# EAGLE board GoggleController (EAGLE 5.10)
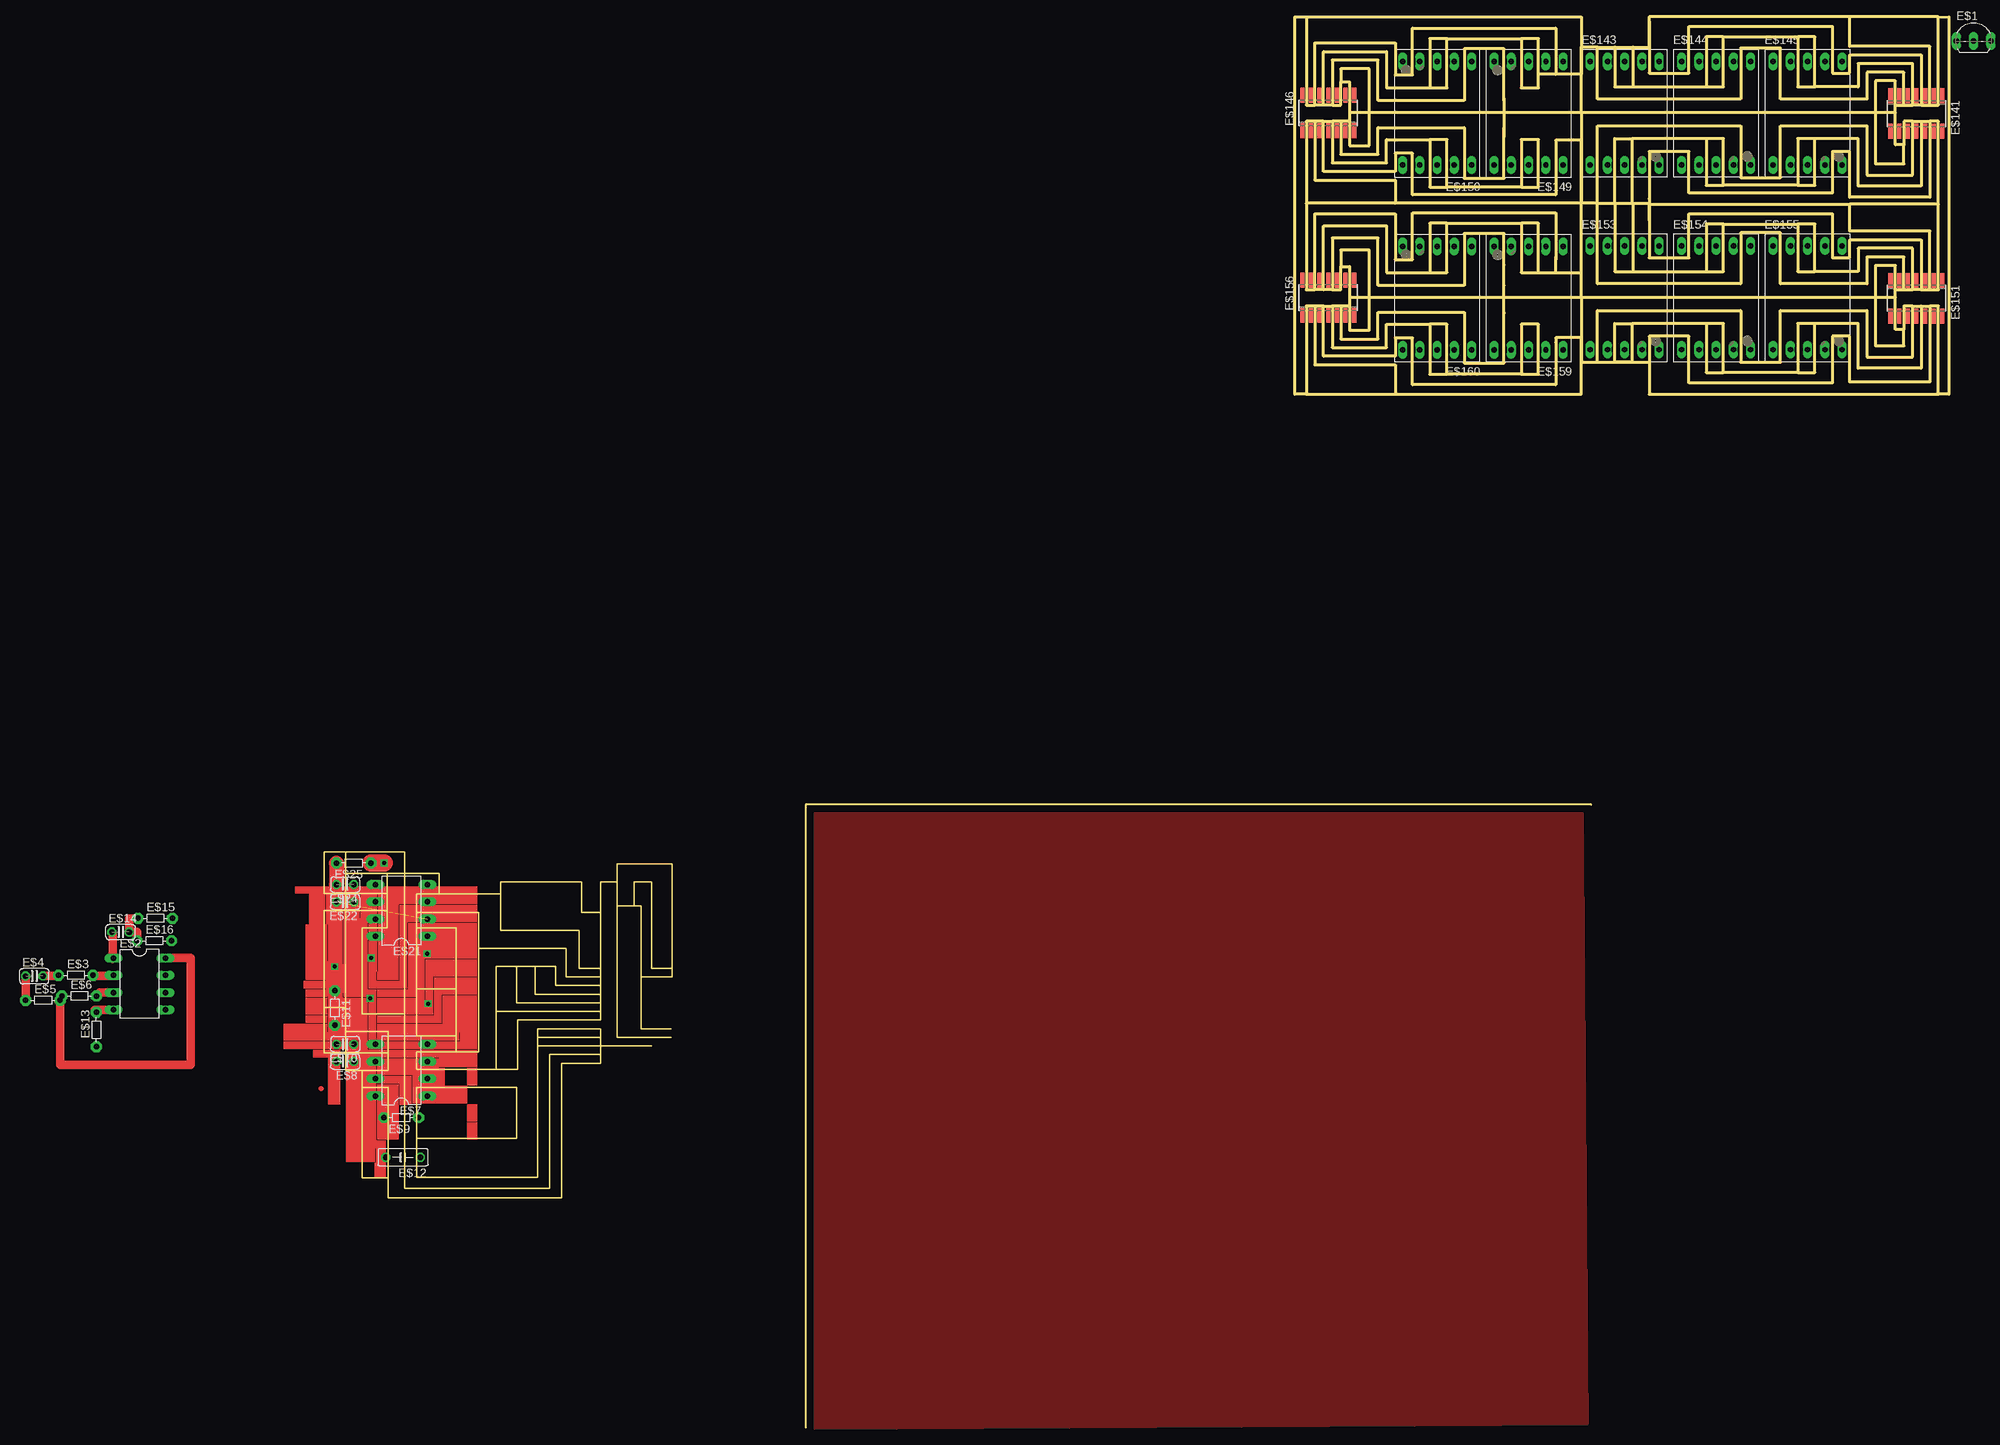
[diagram p0: board, top side]

Size 239.01 x 207.57 mm. Coordinates in mm from the lower left corner, seen from the top.
Outline: 231.14,193.47 228.22,193.47
Outline: 228.22,193.47 184.91,193.47
Outline: 184.91,193.47 184.91,180.14
Outline: 187.32,180.14 187.32,191.57 208.41,191.57 208.41,183.95 214.25,183.95 214.25,191.57 226.95,191.57 226.95,184.33 233.68,184.33 233.68,192.2
Outline: 233.68,192.2 232.41,192.2 232.41,188.77
Outline: 232.41,188.77 231.14,188.77 231.14,194.61
Outline: 231.14,194.61 231.14,198.17 228.22,198.17 228.22,193.47
Outline: 228.22,193.47 228.22,185.98 232.41,185.98 232.41,188.77
Outline: 233.68,192.2 234.95,192.2
Outline: 234.95,192.2 234.95,182.68 225.68,182.68 225.68,189.66 219.33,189.66
Outline: 219.33,189.66 216.79,189.66 216.79,182.8
Outline: 216.79,182.8 205.87,182.8
Outline: 205.87,182.8 205.87,189.66 203.33,189.66
Outline: 203.33,189.66 192.41,189.66
Outline: 192.41,189.66 192.41,180.14
Outline: 234.95,192.2 236.22,192.2
Outline: 236.22,192.2 236.22,181.03 224.41,181.03 224.41,187.76 221.87,187.76 221.87,181.66 200.79,181.66 200.79,187.76 194.94,187.76 194.94,180.77
Outline: 237.49,180.01 237.49,192.2 236.22,192.2
Outline: 189.86,180.14 189.86,189.66 192.41,189.66
Outline: 203.33,189.66 203.33,182.8 205.87,182.8
Outline: 216.79,182.8 219.33,182.8 219.33,189.66
Outline: 231.14,194.61 232.41,194.61
Outline: 232.41,194.61 232.41,199.44 226.95,199.44 226.95,195.5 214.25,195.5 214.25,203 208.41,203 208.41,195.5 187.32,195.5 187.32,203.12
Outline: 187.32,203.12 184.91,203.12 184.91,193.47
Outline: 194.94,206.93 194.94,199.31 200.79,199.31 200.79,206.17 221.87,206.17 221.87,199.31 224.41,199.31 224.41,201.98 234.95,201.98 234.95,194.61
Outline: 234.95,194.61 233.68,194.61
Outline: 232.41,194.61 233.68,194.61
Outline: 233.68,194.61 233.68,200.71 225.68,200.71 225.68,197.28 219.33,197.28
Outline: 219.33,197.28 219.33,204.65 216.79,204.65
Outline: 216.79,204.65 216.79,197.28 219.33,197.28
Outline: 234.95,194.61 236.22,194.61
Outline: 236.22,194.61 236.22,203.25 224.41,203.25 224.41,207.57
Outline: 189.89,203.12 189.86,197.28 192.53,197.28
Outline: 192.53,197.28 203.33,197.28
Outline: 203.33,197.28 205.87,197.28 205.87,204.65
Outline: 205.87,204.65 216.79,204.65
Outline: 205.87,204.65 203.33,204.65 203.33,197.28
Outline: 192.53,203.12 192.53,197.28
Outline: 236.22,194.61 237.49,194.61 237.49,207.57
Outline: 237.49,207.57 224.41,207.57
Outline: 173.56,195.25 173.56,202.87 167.72,202.87 167.72,195.25 155.02,195.25 155.02,201.22 148.28,201.22 148.28,194.61
Outline: 148.28,194.61 149.55,194.61 149.55,198.04
Outline: 149.55,198.04 150.82,198.04 150.82,192.2
Outline: 150.82,192.2 150.82,188.65 153.75,188.65 153.75,199.95 149.55,199.95 149.55,198.04
Outline: 148.28,194.61 147.01,194.61
Outline: 147.01,194.61 147.01,202.49 156.29,202.49 156.29,197.15 162.64,197.15
Outline: 162.64,197.15 165.18,197.15 165.18,204.39
Outline: 165.18,204.39 176.1,204.39
Outline: 176.1,204.39 176.1,197.15 178.64,197.15 178.64,204.39 176.1,204.39
Outline: 147.01,194.61 145.75,194.61
Outline: 145.75,194.61 145.75,203.76 157.56,203.76 157.56,199.06 160.1,199.06 160.1,205.92 181.18,205.92 181.18,199.14
Outline: 224.41,207.57 194.94,207.57 194.94,203.12 192.53,203.12
Outline: 144.47,207.57 144.47,194.61 145.75,194.61
Outline: 165.18,204.39 162.64,204.39 162.64,197.15
Outline: 150.82,192.2 149.55,192.2
Outline: 149.55,192.2 149.55,187.38 155.02,187.38 155.02,191.31 167.72,191.31 167.72,183.82 173.56,183.82 173.56,191.31
Outline: 147.01,192.2 147.01,184.84 157.56,184.84 157.56,187.5 160.1,187.5 160.1,181.41 181.18,181.41 181.18,189.41 184.91,189.41 184.91,169.98 181.18,169.98
Outline: 147.01,192.2 148.28,192.2
Outline: 149.55,192.2 148.28,192.2
Outline: 148.28,192.2 148.28,186.11 156.29,186.11 156.29,189.53 162.64,189.53
Outline: 162.64,189.53 162.64,182.55 165.18,182.55
Outline: 165.18,182.55 165.18,189.53 162.64,189.53
Outline: 147.01,192.2 145.75,192.2
Outline: 145.75,192.2 145.75,183.57 157.56,183.57 157.56,180.14
Outline: 176.1,182.55 176.1,189.53 178.64,189.53 178.64,182.55 176.1,182.55
Outline: 176.1,182.55 165.18,182.55
Outline: 145.75,192.2 144.47,192.2 144.47,167.44 145.75,167.44
Outline: 231.14,166.29 228.22,166.29
Outline: 228.22,166.29 184.91,166.29
Outline: 184.91,166.29 184.91,156.77 187.32,156.77
Outline: 187.32,156.77 187.32,164.39 208.41,164.39 208.41,156.77 214.25,156.77 214.25,164.39 226.95,164.39 226.95,157.53 233.68,157.53 233.68,165.02
Outline: 233.68,165.02 232.41,165.02 232.41,161.59
Outline: 232.41,161.59 231.14,161.59 231.14,167.44
Outline: 231.14,167.44 231.14,170.99 228.22,170.99 228.22,166.29
Outline: 228.22,166.29 228.22,159.18 232.41,159.18 232.41,161.59
Outline: 233.68,165.02 234.95,165.02
Outline: 234.95,165.02 234.95,155.88 225.68,155.88 225.68,162.48 219.33,162.48
Outline: 219.33,162.48 216.79,162.48 216.79,155.24
Outline: 216.79,155.24 205.87,155.24
Outline: 205.87,155.24 205.87,162.48 203.33,162.48
Outline: 203.33,162.48 192.41,162.48
Outline: 192.41,162.48 192.41,156.77 189.86,156.77 189.86,162.48 192.41,162.48
Outline: 234.95,165.02 236.22,165.02
Outline: 236.22,165.02 236.22,153.85 224.41,153.85 224.41,160.58 221.87,160.58 221.87,153.72 200.79,153.72 200.79,160.58 194.94,160.58 194.94,152.07 237.49,152.07
Outline: 237.49,152.07 237.49,165.02 236.22,165.02
Outline: 203.33,162.48 203.33,155.24 205.87,155.24
Outline: 216.79,155.24 219.33,155.24 219.33,162.48
Outline: 231.14,167.44 232.41,167.44
Outline: 232.41,167.44 232.41,172.26 226.95,172.26 226.95,168.33 214.25,168.33 214.25,175.82 208.41,175.82 208.41,168.33 187.32,168.33 187.32,180.14
Outline: 187.32,180.14 184.91,180.14
Outline: 194.94,180.14 194.94,172.14 200.79,172.14 200.79,178.61 221.87,178.61 221.87,172.14 224.41,172.14 224.41,174.8 234.95,174.8 234.95,167.44
Outline: 234.95,167.44 233.68,167.44
Outline: 232.41,167.44 233.68,167.44
Outline: 233.68,167.44 233.68,173.53 225.68,173.53 225.68,170.1 219.33,170.1
Outline: 219.33,170.1 219.33,177.09 216.79,177.09
Outline: 216.79,177.09 216.79,170.1 219.33,170.1
Outline: 234.95,167.44 236.22,167.44
Outline: 236.22,167.44 236.22,176.07 224.41,176.07 224.41,180.01
Outline: 184.91,166.29 184.91,180.14
Outline: 189.86,180.14 189.86,170.1 192.53,170.1
Outline: 192.53,170.1 203.33,170.1
Outline: 203.33,170.1 205.87,170.1 205.87,177.09
Outline: 205.87,177.09 216.79,177.09
Outline: 205.87,177.09 203.33,177.09 203.33,170.1
Outline: 192.41,180.14 192.53,180.14
Outline: 192.53,180.14 192.53,170.1
Outline: 236.22,167.44 237.49,167.44 237.49,180.01
Outline: 237.49,180.01 224.41,180.01
Outline: 173.56,168.07 173.56,175.69 167.72,175.69 167.72,168.07 155.02,168.07 155.02,175.06 148.28,175.06 148.28,167.44
Outline: 148.28,167.44 149.55,167.44 149.55,170.87
Outline: 149.55,170.87 150.82,170.87 150.82,165.02
Outline: 150.82,165.02 150.82,161.47 153.75,161.47 153.75,173.28 149.55,173.28 149.55,170.87
Outline: 148.28,167.44 147.01,167.44
Outline: 147.01,167.44 147.01,176.83 156.29,176.83 156.29,169.98 162.64,169.98
Outline: 162.64,169.98 165.18,169.98 165.18,177.22
Outline: 165.18,177.22 176.1,177.22
Outline: 176.1,177.22 176.1,169.98 178.64,169.98
Outline: 147.01,167.44 145.75,167.44
Outline: 145.75,167.44 145.75,178.61 157.56,178.61 157.56,171.88 160.1,171.88 160.1,178.74 181.18,178.74 181.18,171.88
Outline: 178.64,169.98 178.64,177.22 176.1,177.22
Outline: 165.18,177.22 162.64,177.22 162.64,169.98
Outline: 150.82,165.02 149.55,165.02
Outline: 149.55,165.02 149.55,160.2 155.02,160.2 155.02,164.13 167.72,164.13 167.72,156.64 173.56,156.64 173.56,164.13
Outline: 181.18,160.32 181.18,153.47 160.1,153.47 160.1,160.32 157.56,160.32 157.56,157.66 147.01,157.66 147.01,165.02
Outline: 147.01,165.02 148.28,165.02
Outline: 149.55,165.02 148.28,165.02
Outline: 148.28,165.02 148.28,158.93 156.29,158.93 156.29,162.36 162.64,162.36
Outline: 162.64,162.36 162.64,154.99 165.18,154.99
Outline: 165.18,154.99 165.18,162.36 162.64,162.36
Outline: 147.01,165.02 145.75,165.02
Outline: 145.75,165.02 145.75,156.39 157.56,156.39 157.56,152.07
Outline: 176.1,154.99 176.1,162.36 178.64,162.36 178.64,154.99 176.1,154.99
Outline: 176.1,154.99 165.18,154.99
Outline: 145.75,165.02 144.47,165.02 144.47,152.07
Outline: 144.47,152.07 157.56,152.07
Outline: 187.32,156.77 195,156.77
Outline: 192.53,180.14 194.94,180.14
Outline: 194.94,177.62 194.94,180.01
Outline: 194.94,180.01 224.41,180.01
Outline: 194.94,180.87 194.94,180.14
Outline: 194.94,180.14 194.94,180.01
Outline: 187.32,180.14 189.86,180.14
Outline: 189.86,180.14 192.41,180.14
Outline: 194.94,180.14 194.94,180.14
Outline: 187.32,203.12 189.89,203.12
Outline: 189.89,203.12 192.53,203.12
Outline: 178.64,169.98 181.18,169.98
Outline: 181.18,169.98 181.18,172.24
Outline: 157.56,152.07 184.91,152.07 184.91,160.38 181.18,160.38 181.18,159.69
Outline: 173.56,163.96 173.56,171.12
Outline: 173.56,195.61 173.56,189.89
Outline: 184.91,166.29 150.82,166.29
Outline: 184.91,193.47 150.82,193.47
Outline: 181.18,199.14 184.91,199.14 184.91,207.57 142.77,207.57 142.77,152.07 144.47,152.07
Outline: 181.18,199.14 178.64,199.14
Outline: 237.49,207.57 239.01,207.54 239.01,152.04 237.49,152.07
Outline: 186.41,91.69 70.84,91.69 70.84,0
Outline: 184.91,180.14 157.56,180.14
Outline: 157.56,180.14 144.47,180.14
Outline: 40.64,66.32 40.64,67.59
Outline: 40.64,67.59 37.46,67.59 37.46,73.18 25.91,73.18 25.91,78.51
Outline: 25.91,78.51 25.91,80.29 37.85,80.29 37.85,75.84 40.64,75.84
Outline: 25.91,78.51 16.89,78.51
Outline: 16.89,78.51 13.59,78.51 13.59,75.84
Outline: 13.59,75.84 22.73,75.84 22.73,70.51
Outline: 22.73,70.51 35.56,70.51 35.56,66.32 40.64,66.32
Outline: 40.64,66.32 40.64,65.05
Outline: 30.99,67.84 34.04,67.84 34.04,65.05 40.64,65.05
Outline: 30.99,67.84 28.32,67.84
Outline: 28.32,67.84 25.27,67.84 25.27,61.24
Outline: 25.27,61.24 25.27,52.73
Outline: 25.27,52.73 13.59,52.73 13.59,55.27 19.43,55.27
Outline: 19.43,55.27 22.73,55.27 22.73,70.51
Outline: 5.59,52.6 9.4,52.6 9.4,55.14
Outline: 9.4,55.14 9.4,58.32 3.17,58.32
Outline: 3.17,58.32 3.17,61.87
Outline: 3.17,61.87 3.17,76.1
Outline: 3.17,76.1 9.27,76.1
Outline: 9.27,76.1 9.27,73.56 5.59,73.56 5.59,60.86 11.81,60.86
Outline: 5.59,50.06 5.59,52.6
Outline: 9.4,36.73 9.4,50.06 5.59,50.06
Outline: 9.4,36.73 9.4,33.81 34.93,33.81 34.93,53.62 40.64,53.62 40.64,54.89
Outline: 40.64,54.89 33.15,54.89 33.15,35.2 11.81,35.2 11.81,60.86
Outline: 16.89,78.51 16.89,81.56 11.81,81.56
Outline: 11.81,81.56 11.81,60.86
Outline: 13.59,75.84 13.59,73.56
Outline: 13.59,73.56 13.59,64.54
Outline: 13.59,64.54 13.59,57.68 19.43,57.68
Outline: 13.59,42.57 13.59,50.06 28.32,50.06 28.32,42.57 13.59,42.57
Outline: 13.59,42.57 13.59,36.86 31.37,36.86 31.37,56.16
Outline: 40.64,54.89 40.64,56.16
Outline: 40.64,56.16 31.37,56.16
Outline: 31.37,56.16 31.37,57.43
Outline: 31.37,57.43 31.37,58.7 40.64,58.7 40.64,57.43
Outline: 40.64,57.43 40.64,56.16
Outline: 40.64,57.43 31.37,57.43
Outline: 48.13,56.16 40.64,56.16
Outline: 40.64,61.24 40.64,59.97 28.45,59.97 28.45,52.73 25.27,52.73
Outline: 40.64,61.24 40.64,62.51
Outline: 40.64,62.51 40.64,63.78
Outline: 40.64,63.78 40.64,65.05
Outline: 51.05,57.43 43.05,57.43 43.05,76.73
Outline: 5.59,50.06 5.59,36.73 9.4,36.73
Outline: 3.17,58.32 3.17,55.14
Outline: 3.17,55.14 3.17,52.6 5.59,52.6
Outline: 3.17,55.14 9.4,55.14
Outline: 3.17,55.14 0,55.14 0,61.87
Outline: 0,61.87 3.17,61.87
Outline: 0,61.87 0,76.1 3.17,76.1
Outline: 19.43,57.68 19.43,55.27
Outline: 3.17,76.1 3.17,78.64
Outline: 3.17,78.64 9.27,78.64
Outline: 9.27,78.64 9.27,76.1
Outline: 9.27,78.64 9.27,81.56
Outline: 9.27,81.56 3.17,81.56
Outline: 3.17,81.56 3.17,78.64
Outline: 3.17,78.64 0,78.64 0,84.73 3.17,84.73
Outline: 3.17,84.73 3.17,81.56
Outline: 9.27,81.56 11.81,81.56
Outline: 11.81,81.56 11.81,84.73 3.17,84.73
Outline: 13.59,73.56 19.43,73.56 19.43,64.54
Outline: 19.43,64.54 19.43,57.68
Outline: 13.59,64.54 19.43,64.54
Outline: 40.64,67.59 40.64,75.84
Outline: 40.64,75.84 40.64,80.29 43.05,80.29
Outline: 43.05,80.29 43.05,76.73
Outline: 51.05,58.7 46.61,58.7 46.61,66.32
Outline: 46.61,66.32 46.61,76.73 45.59,76.73
Outline: 45.59,76.73 43.05,76.73
Outline: 45.59,76.73 45.59,80.29 48.13,80.29 48.13,67.59 51.18,67.59
Outline: 43.05,80.29 43.05,82.96 51.18,82.96 51.18,67.59
Outline: 46.61,66.32 51.18,66.32 51.18,67.59
Outline: 40.64,61.24 25.27,61.24
Outline: 40.64,62.51 28.32,62.51 28.32,67.84
Outline: 40.64,63.78 30.99,63.78 30.99,67.84
Copper layers (1*16): Top 0.035mm / dielectric 1.5mm / Bottom 0.035mm
Design rules "default": minimum track width 10mil, minimum drill 24mil, track to track 8mil, track to pad 8mil, pad to pad 8mil, via to via 8mil, smd to smd 8mil, copper to edge 40mil, drill to drill 8mil, minimum pad ring 10mil, minimum via ring 8mil, stop-mask expansion 4mil, vias tented up to drill 0mil, thermal gap 10mil

## Footprints (pad centres in the part's own frame; a part is rotated, then mirrored left to right if it is on the bottom)
TO92-ECB = drill 0.813 long: B 2.54,0; C 0,0; E -2.54,0
DIL08 = drill 0.813 long: 1 -3.81,-3.81; 2 -1.27,-3.81; 3 1.27,-3.81; 4 3.81,-3.81; 5 3.81,3.81; 6 1.27,3.81; 7 -1.27,3.81; 8 -3.81,3.81
R-5 = drill 0.813 pad 1.6 octagon: 1 -2.54,0; 2 2.54,0
C025-024X044 = drill 0.813 octagon: 1 -1.27,0; 2 1.27,0
C050-025X075 = drill 0.813 octagon: 1 -2.54,0; 2 2.54,0
SO14 = smd 0.6 x 2.2: 1 -3.81,-2.6; 2 -2.54,-2.6; 3 -1.27,-2.6; 4 0,-2.6; 5 1.27,-2.6; 6 2.54,-2.6; 7 3.81,-2.6; 8 3.81,2.6; 9 2.54,2.6; 10 1.27,2.6; 11 0,2.6; 12 -1.27,2.6; 13 -2.54,2.6; 14 -3.81,2.6
SA56-11 = drill 0.8 long: 1 -5.08,-7.62; 2 -2.54,-7.62; 3 0,-7.62; 4 2.54,-7.62; 5 5.08,-7.62; 6 5.08,7.62; 7 2.54,7.62; 8 0,7.62; 9 -2.54,7.62; 10 -5.08,7.62

## Placement (x,y rotation side)
E$1  [TO92-ECB]  242.65,204.06 0 top
E$2  [DIL08]  -27.2,65.3 270 top  (outside the outline)
E$3  [R-5]  -36.58,66.57 0 top  (outside the outline)
E$4  [C025-024X044]  -42.67,66.45 0 top  (outside the outline)
E$5  [R-5]  -41.4,62.89 0 top  (outside the outline)
E$6  [R-5]  -36.07,63.53 0 top  (outside the outline)
E$7  [DIL08]  11.33,52.6 90 top
E$8  [C025-024X044]  3.07,53.87 180 top
E$9  [R-5]  11.33,45.62 180 top
E$10  [C025-024X044]  3.07,56.41 180 top
E$11  [R-5]  1.55,61.75 270 top
E$12  [C050-025X075]  11.58,39.78 180 top
E$13  [R-5]  -33.53,58.57 90 top  (outside the outline)
E$14  [C025-024X044]  -29.97,72.92 0 top  (outside the outline)
E$15  [R-5]  -24.89,74.96 0 top  (outside the outline)
E$16  [R-5]  -25.02,71.65 0 top  (outside the outline)
E$21  [DIL08]  11.33,76.1 90 top
E$22  [C025-024X044]  3.07,77.37 180 top
E$24  [C025-024X044]  3.07,79.91 180 top
E$25  [R-5]  4.34,83.08 180 top
E$141  [SO14]  234.25,193.36 180 top
E$143  [SA56-11]  191.32,193.42 0 top
E$144  [SA56-11]  204.78,193.42 0 top
E$145  [SA56-11]  218.24,193.42 0 top
E$146  [SO14]  147.72,193.46 0 top
E$149  [SA56-11]  177.18,193.39 180 top
E$150  [SA56-11]  163.72,193.39 180 top
E$151  [SO14]  234.25,166.18 180 top
E$153  [SA56-11]  191.32,166.25 0 top
E$154  [SA56-11]  204.78,166.25 0 top
E$155  [SA56-11]  218.24,166.25 0 top
E$156  [SO14]  147.72,166.28 0 top
E$159  [SA56-11]  177.18,166.21 180 top
E$160  [SA56-11]  163.72,166.21 180 top

## Library data of the parts
E$1 = transistor
E$2 E$7 E$21 = 40xx
E$3 E$5 E$6 E$9 E$11 E$13 E$15 E$16 E$25 = discrete
E$4 E$8 E$10 E$12 E$14 E$22 E$24 = rcl
E$141 E$146 E$151 E$156 = analog-devices
E$143-E$145 E$149 E$150 E$153-E$155 E$159 E$160 = display-kingbright

## Nets
GND: E$7.2 E$8.2 E$12.1 E$21.2 E$22.2
S$6: E$4.1 E$5.1
S$9: E$11.1
S$17: E$14.2 E$15.1
S$31: E$24.2 E$25.2
S$46: E$25.1

## Tracks (layer width: path | path; a pad name or v marks a point on that pad's centre or on a via)
GND  (via drill 0.6)  (1 unrouted)
  other vias: 15.27,62.38
  pour Top (no thermals): 71.6,-0.13 185.9,0.51 185.14,91.95 70.84,91.31
S$1
  Top 0.7: 8.67,66.55 8.57,66.55
S$2
  Top 1.016: 10.31,52.46 8.41,52.46
S$3
  Top 1.27: -30.86,66.45 -34.04,66.45
S$4
  Top 1.016: 10.01,51.16 8.41,51.16
S$5
  Top 1.27: -41.53,66.45 -38.99,66.45
S$6
  Top 1.27: E$4.1 E$5.1
S$8  (via drill 0.6)
  other vias: 6.88,69.11
S$9  (via drill 0.6)
  Top 2.54: v1.55,67.84 E$11.1
S$10
  Top 1.016: 9.91,76.16 9.41,75.66 9.41,73.76
S$12
  Top 1.27: -39.12,62.76 -39.12,62.89 -38.86,63.14 | -38.86,63.14 -38.48,63.53 | -38.86,63.14 -38.86,53.37 -19.69,53.37 -19.69,69.11 -24,69.11
S$13
  Top 1.27: -30.73,64.03 -33.02,64.03 -33.66,63.4
S$14  (via drill 0.6)
  other vias: 6.76,63.14
S$15
  Top 1.27: -33.78,61.11 -33.78,61.49 -30.73,61.49
S$16
  Top 1.27: -31.12,68.99 -31.12,72.8 -31.24,72.8
S$17
  Top 1.27: -27.56,71.53 -27.56,72.92 E$14.2 -28.7,74.96 E$15.1
S$31
  Top 2.184: E$25.2 E$24.2
S$45  (via drill 0.6)
  other vias: 15.14,69.75
S$46  (via drill 0.6)
  Top 2.54: E$25.1 v8.79,83.08
S$465
  Top 1.016: 8.71,49.76 8.71,47.96
S$491
  Top 0.7: -0.39,49.86 -0.49,49.86
(copper drawn outside any net)
  shapes: Top area x153

## Text on the board
Unrouted: Vcc | Q7 | Q6 | Q5 | Q4 | MR | cp | gnd | Q3 | Q2 | Q1 | Q0 | B | A | Vcc | A | B | Q0 | Q1 | Q2 | Q3 | gnd | cp | MR | Q4 | Q5 | Q6 | Q7 | Q7 | Q6 | Q5 | Q4 | cp | gnd | Q3 | Q2 | Q1 | Q0 | B | A | Vcc | MR | A | B | Q0 | Q1 | Q2 | Q3 | cp | MR | Q4 | Q5 | Q6 | Q7 | Vcc | gnd | IN | STROBE | mclr | + | - | GND | OUT | RSET | VSS | + | 4.7UF | CLK | VDD | OUTA | VCC | mclr | PGD | INA- | OUTB | RA0 | PGC | 1K | RA1 | PGM | 0.1UF | INA+ | RA2 | RB4 | INB- | 10K | RA3 | RB3 | 10K | GND | INB+ | RA4 | RB2 | RA5 | RB1 | SCL | VSS | RB0 | SDA | 10K | IN | OSC1 | VDD | OSC2 | VSS | STROBE | RC0 | RC7 | GND | OUT | RC1 | RC6 | RSET | VSS | RC2 | RC5 | VUSB | RC4 | CLK | VDD